# Altium PCB DistanceMeasure.PcbDoc
Units mm, origin at the board's own origin, x right, y up, seen from the top; angles counter-clockwise.
Board outline 152.4 x 101.6 mm, 2 copper layers (Top Layer, Bottom Layer); 9 components, 10 nets, 82 pads, 0 vias.
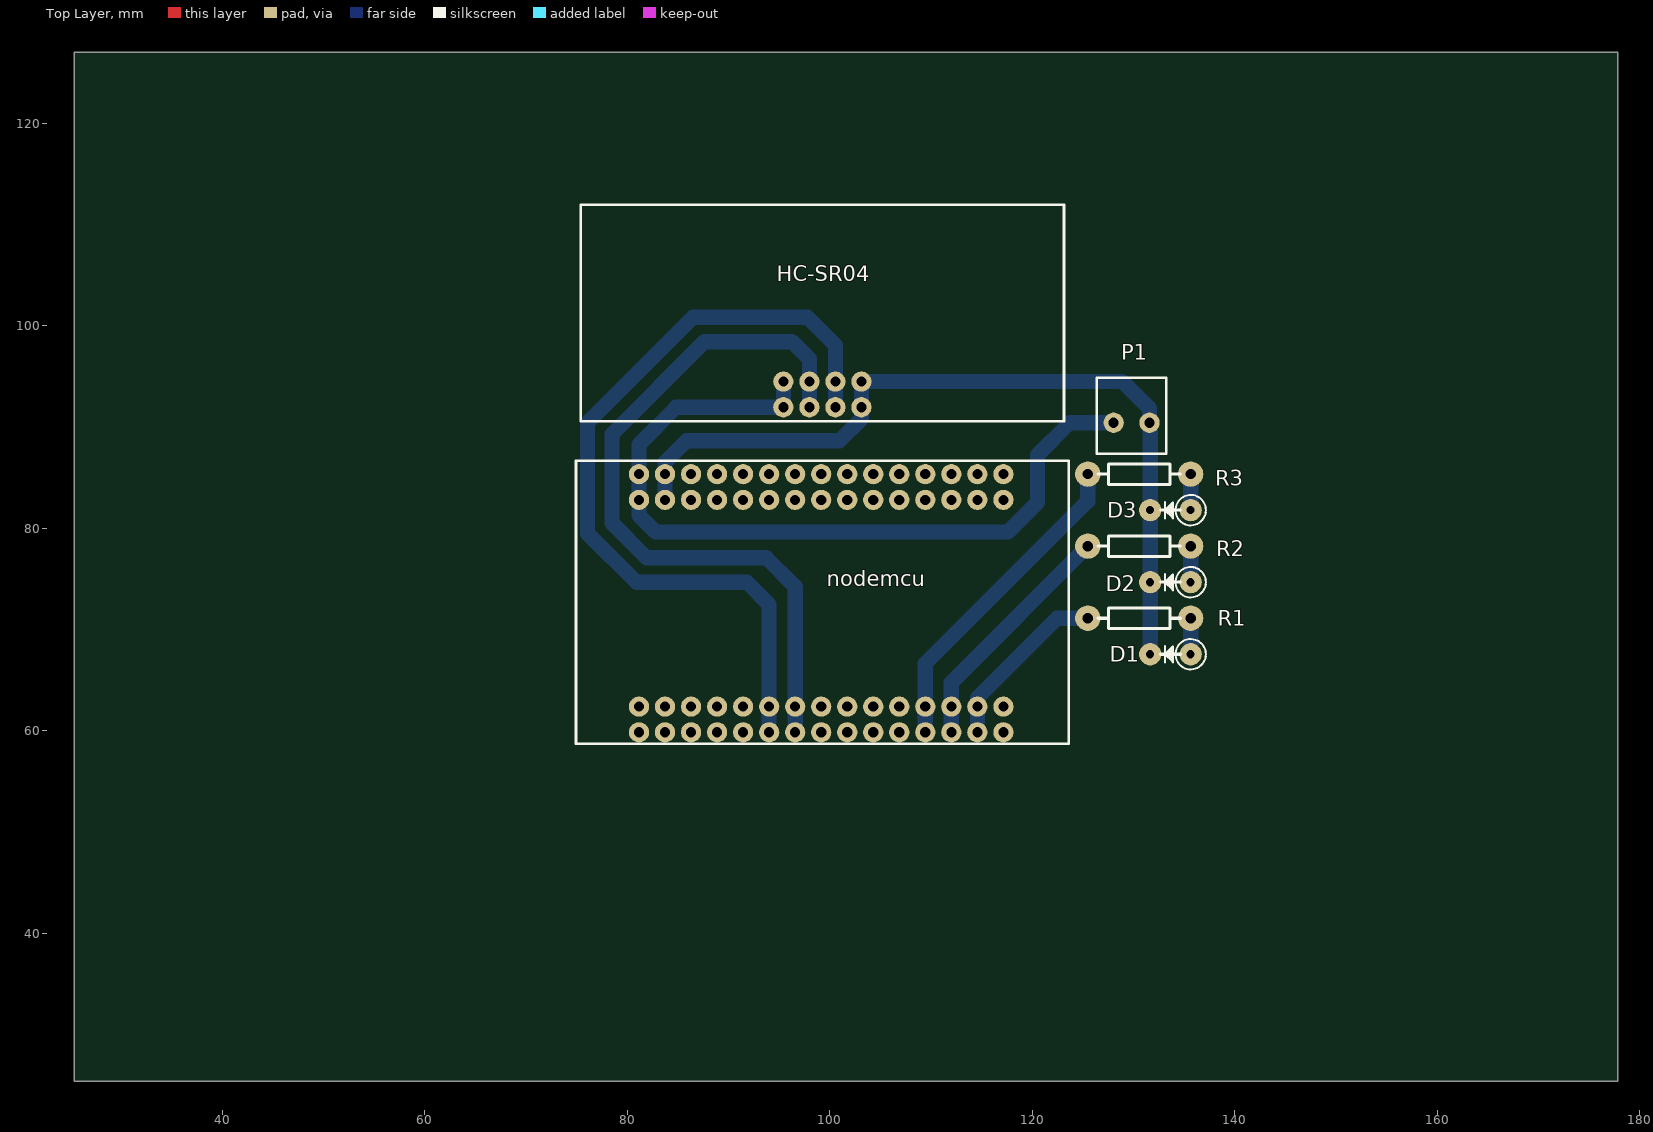
[diagram p0: Top Layer view]
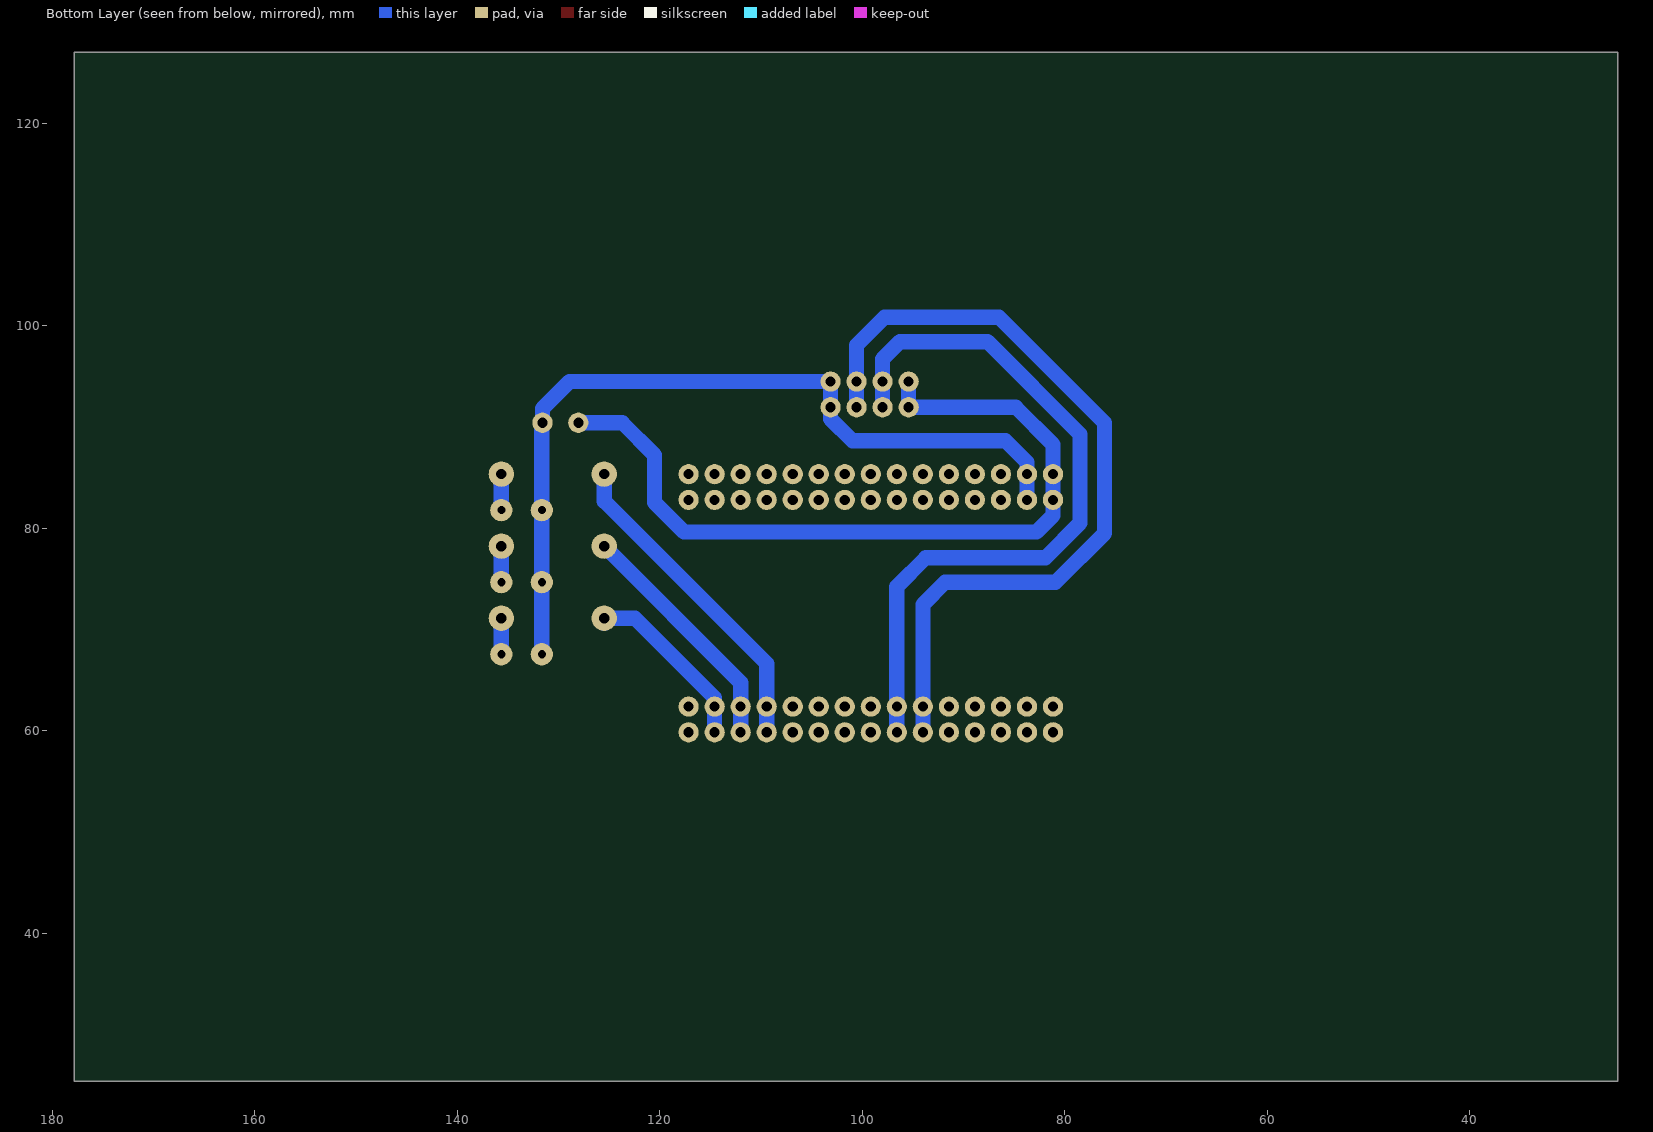
[diagram p1: Bottom Layer view, seen from below]

## Layer stack, top to bottom
Top Layer: signal copper 0.0356
Dielectric: dielectric 0.32, FR-4, Dk 4.8
Bottom Layer: signal copper 0.0356

## Board outline
25.4,25.4 177.8,25.4 177.8,127 25.4,127

## Design rules (kind name [scope] priority, off if disabled: settings)
Clearance [All] p1: gap=0.254
PolygonConnect [All] p1: connectstyle=Relief reliefconductorwidth=0.254 reliefentries=4 polygonreliefangle="90 Angle"
RoutingVias [All] p1: holewidth=0.711 width=1.27 viastyle="Through Hole" minholewidth=0.711 minwidth=1.27 maxholewidth=0.711 maxwidth=1.27
SilkscreenOverComponentPads [All] p1: minsilkscreentomaskgap=0.254
SolderMaskExpansion [All] p1: expansion=0.102
Width [All] p1: maxlimit=3 minlimit=1 preferedwidth=2 minimp=50.000000 maximp=50.000000 favimp=50.000000
27 further rules are at their usual default settings.

## Components (designator, comment, footprint, x,y, rotation, side; value= is the part's Value field where it differs from the comment)
D1 "LED" DIODE4MMUP 135.636,67.564 r180 top
D2 "LED" DIODE4MMUP 135.636,74.676 r180 top
D3 "LED" DIODE4MMUP 135.636,81.788 r180 top
HC-SR04 "HC-SR04" HC-SR04 95.414,94.488 r0 top
nodemcu "nodemcu" nodemcu 81.16,59.854 r0 top
P1 "LittleGreenMos" LittleGreenMos 128.027,90.424 r0 top
R1 "200" RES0.4 125.476,71.12 r0 top
R2 "200" RES0.4 125.476,78.232 r0 top
R3 "200" RES0.4 125.476,85.344 r0 top

## Footprints (in the part's own frame and the unit in brackets; to place one, negate y for a bottom-side part, rotate by r counter-clockwise, add the part's x,y. Pads: shape width x height; smd on the part's side, far side on the other; paste and mask are expansions set on the pad)
DIODE4MMUP [mm]
  round 2.2 hole 0.8: N(4,0) P(0,0)
  silkscreen extent -1.5,-1.5 3,1.5
HC-SR04 [mm] "HC-SR04"
  round 2 hole 1: Echo(5.14,-2.54) Echo(5.14,0) Gnd(7.71,-2.54) Gnd(7.71,0) Trig(2.57,-2.54) Trig(2.57,0) Vcc(0,-2.54) Vcc(0,0)
  silkscreen extent -20,-3.94 27.71,17.46
LittleGreenMos [mm] "LittleGreenMos"
  round 2 hole 1: 1(0,0) 2(3.545,0)
  silkscreen extent -1.65,-3.05 5.21,4.44
nodemcu [mm] "nodemcu"
  round 2 hole 1: 3.3a(0,0) 3.3a(0,2.54) 3.3b(23.13,0) 3.3b(23.13,2.54) 3.3c(10.28,22.95) 3.3c(10.28,25.49) A0(35.98,22.95) A0(35.98,25.49) CLK(15.42,22.95) CLK(15.42,25.49) CMD(20.56,22.95) CMD(20.56,25.49) D0(35.98,0) D0(35.98,2.54) D1(33.41,0) D1(33.41,2.54) D2(30.84,0) D2(30.84,2.54) D3(28.27,0) D3(28.27,2.54) D4(25.7,0) D4(25.7,2.54) D5(17.99,0) D5(17.99,2.54) D6(15.42,0) D6(15.42,2.54) D7(12.85,0) D7(12.85,2.54) D8(10.28,0) D8(10.28,2.54) EN(7.71,22.95) EN(7.71,25.49) Ga(2.57,0) Ga(2.57,2.54) Gb(20.56,0) Gb(20.56,2.54) Gc(2.57,22.95) Gc(2.57,25.49) Gd(12.85,22.95) Gd(12.85,25.49) RST(5.14,22.95) RST(5.14,25.49) RSVa(30.84,22.95) RSVa(30.84,25.49) RSVb(33.41,22.95) RSVb(33.41,25.49) RX(7.71,0) RX(7.71,2.54) SD0(17.99,22.95) SD0(17.99,25.49) SD1(23.13,22.95) SD1(23.13,25.49) SD2(25.7,22.95) SD2(25.7,25.49) SD3(28.27,22.95) SD3(28.27,25.49) TX(5.14,0) TX(5.14,2.54) Vin(0,22.95) Vin(0,25.49)
  silkscreen extent -6.22,-1.14 42.42,26.8
RES0.4 [mm]
  round 2.5 hole 1: 1(0,0) 2(10.16,0)
  silkscreen extent 1.02,-1.02 9.14,1.02

## Part data
R1 R2 R3: library part RES1

## Nets (pads, with @x,y where several pads share a name; then routed paths per layer and width w, separated by ;. In a path a pad name is that pad's centre, name@x,y a point inside that pad or via, vN(x,y) a via of type N, cw(c..) or ccw(c..) an arc to the next point about the centre after c; other vN are vias at no path point)
NetD1_A: D1.P R1.2 | length 3.6
  Bottom Layer w1.5: D1.P R1.2
NetD1_K: D1.N D2.N D3.N HC-SR04.Gnd nodemcu.Gc P1.2 | length 82.4
  Bottom Layer w1.5: nodemcu.Gc@83.73,82.804 83.73,85.344 83.73,86.524 85.852,88.646 100.965,88.646 103.124,90.805 103.124,91.948 103.124,94.488 128.905,94.488 131.572,91.821 P1.2 ; D1.N D2.N D3.N P1.2@131.636,90.424
NetD2_A: D2.P R2.2 | length 3.6
  Bottom Layer w1.5: D2.P R2.2
NetD3_A: D3.P R3.2 | length 3.6
  Bottom Layer w1.5: D3.P R3.2
NetHC-SR04_Echo: HC-SR04.Echo nodemcu.D7 | length 80.6
  Bottom Layer w1.5: nodemcu.D7@93.913,62.297 nodemcu.D7@94.01,62.2 ; nodemcu.D7@94.01,59.854 nodemcu.D7@94.01,62.2 ; HC-SR04.Echo@100.554,91.948 100.554,94.488 100.554,98.074 97.79,100.838 86.487,100.838 76.073,90.424 76.073,79.502 80.899,74.676 91.821,74.676 94.01,72.487 94.01,62.394 nodemcu.D7@94.01,62.2
NetHC-SR04_Trig: HC-SR04.Trig nodemcu.D6 | length 72.6
  Bottom Layer w1.5: nodemcu.D6@96.58,59.854 96.58,62.394 96.58,74.235 93.726,77.089 81.915,77.089 78.486,80.518 78.486,89.281 87.63,98.425 96.266,98.425 97.984,96.707 97.984,94.488 HC-SR04.Trig@97.984,91.948
NetHC-SR04_Vcc: HC-SR04.Vcc nodemcu.Vin P1.1 | length 80.1
  Bottom Layer w1.5: HC-SR04.Vcc@95.414,94.488 95.414,91.948 84.836,91.948 81.16,88.272 81.16,85.344 81.16,82.804 81.16,81.273 82.804,79.629 117.602,79.629 120.523,82.55 120.523,87.249 123.698,90.424 P1.1
Netnodemcu_D1: nodemcu.D1 R1.1 | length 17.8
  Bottom Layer w1.5: nodemcu.D1@114.57,59.854 114.57,62.394 114.57,63.262 122.428,71.12 124.968,71.12 125.222,70.866 R1.1@125.476,70.612
Netnodemcu_D2: nodemcu.D2 R2.1 | length 24
  Bottom Layer w1.5: nodemcu.D2@112,59.854 112,62.394 112,64.756 R2.1
Netnodemcu_D3: nodemcu.D3 R3.1 | length 32.1
  Bottom Layer w1.5: nodemcu.D3@109.43,59.854 109.43,62.394 109.43,66.631 125.476,82.677 R3.1
pads on no net: nodemcu.3.3a nodemcu.3.3b nodemcu.3.3c nodemcu.A0 nodemcu.CLK nodemcu.CMD nodemcu.D0 nodemcu.D4 nodemcu.D5 nodemcu.D8 nodemcu.EN nodemcu.Ga nodemcu.Gb nodemcu.Gd nodemcu.RST nodemcu.RSVa nodemcu.RSVb nodemcu.RX nodemcu.SD0 nodemcu.SD1 nodemcu.SD2 nodemcu.SD3 nodemcu.TX